# Altium PCB STM32最小系统.PcbDoc
Units mil, origin at the board's own origin, x right, y up, seen from the top; angles counter-clockwise.
Board outline 6000 x 4000 mil, 2 copper layers (Top Layer, Bottom Layer); 29 components, 14 nets, 111 pads, 0 vias.
Unrouted connection lines stored in the file: 61.
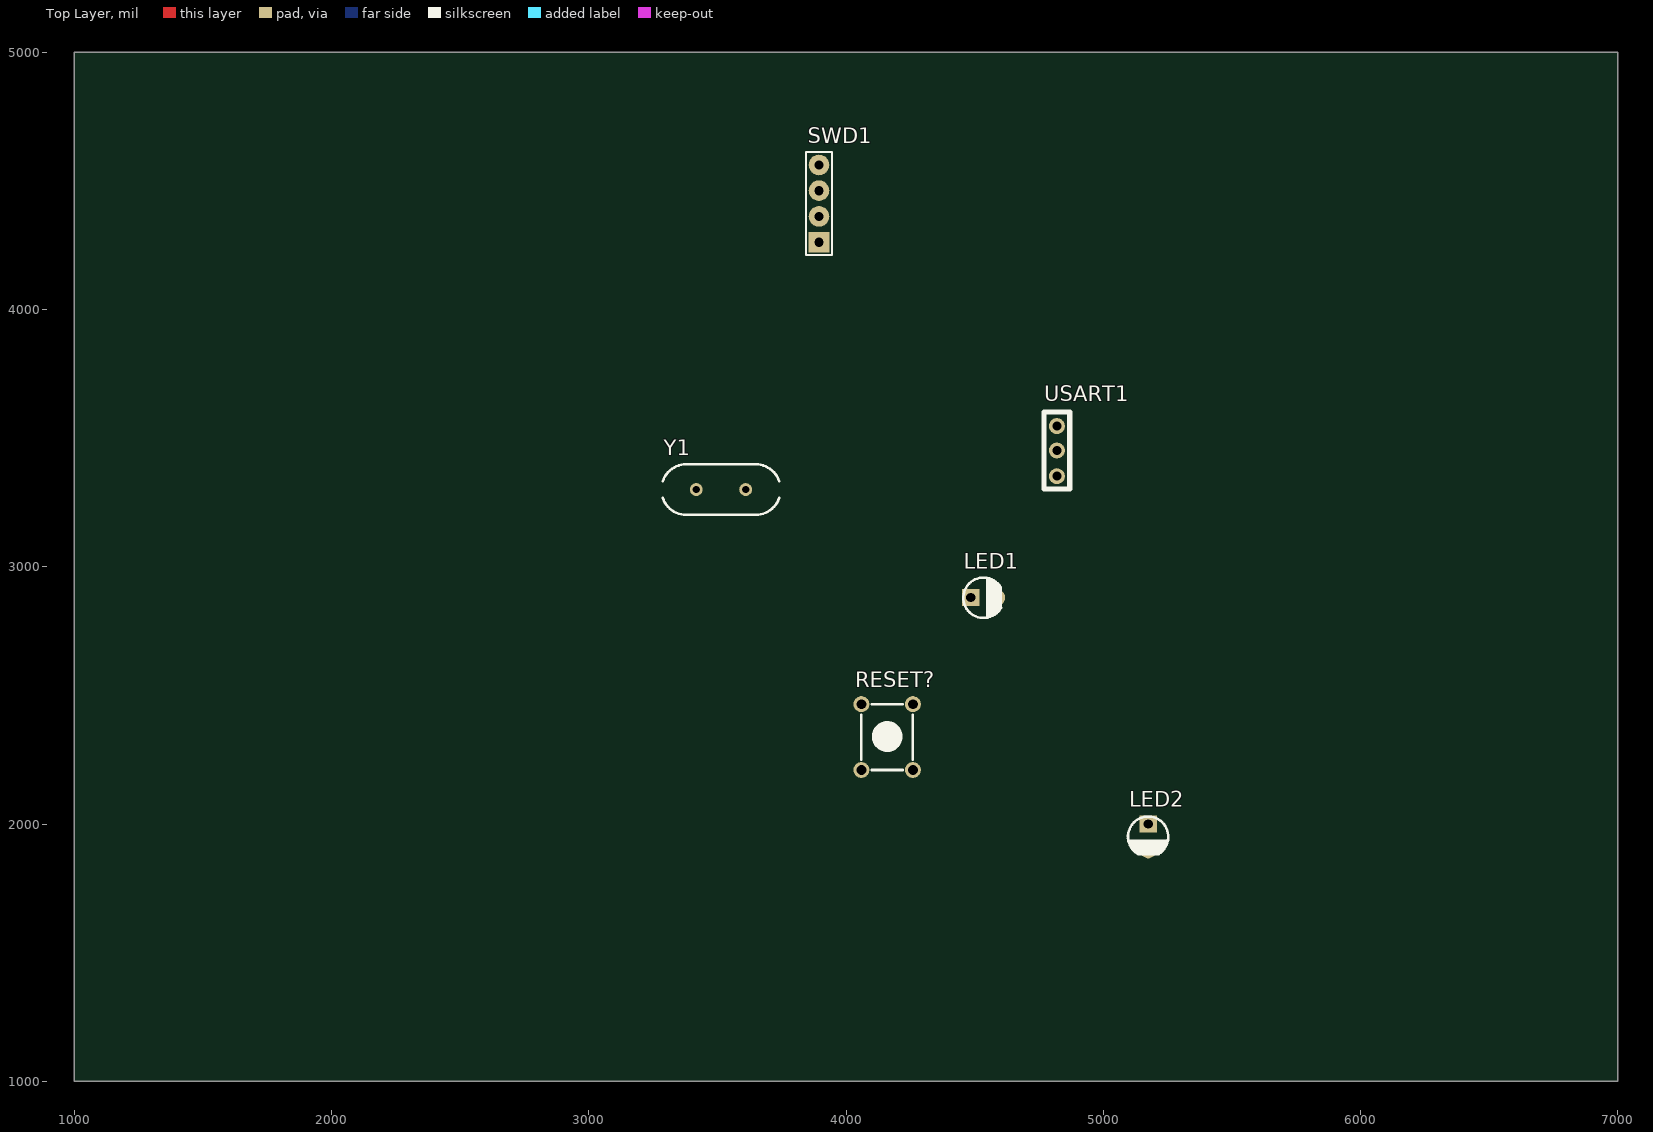
[diagram p0: Top Layer view]
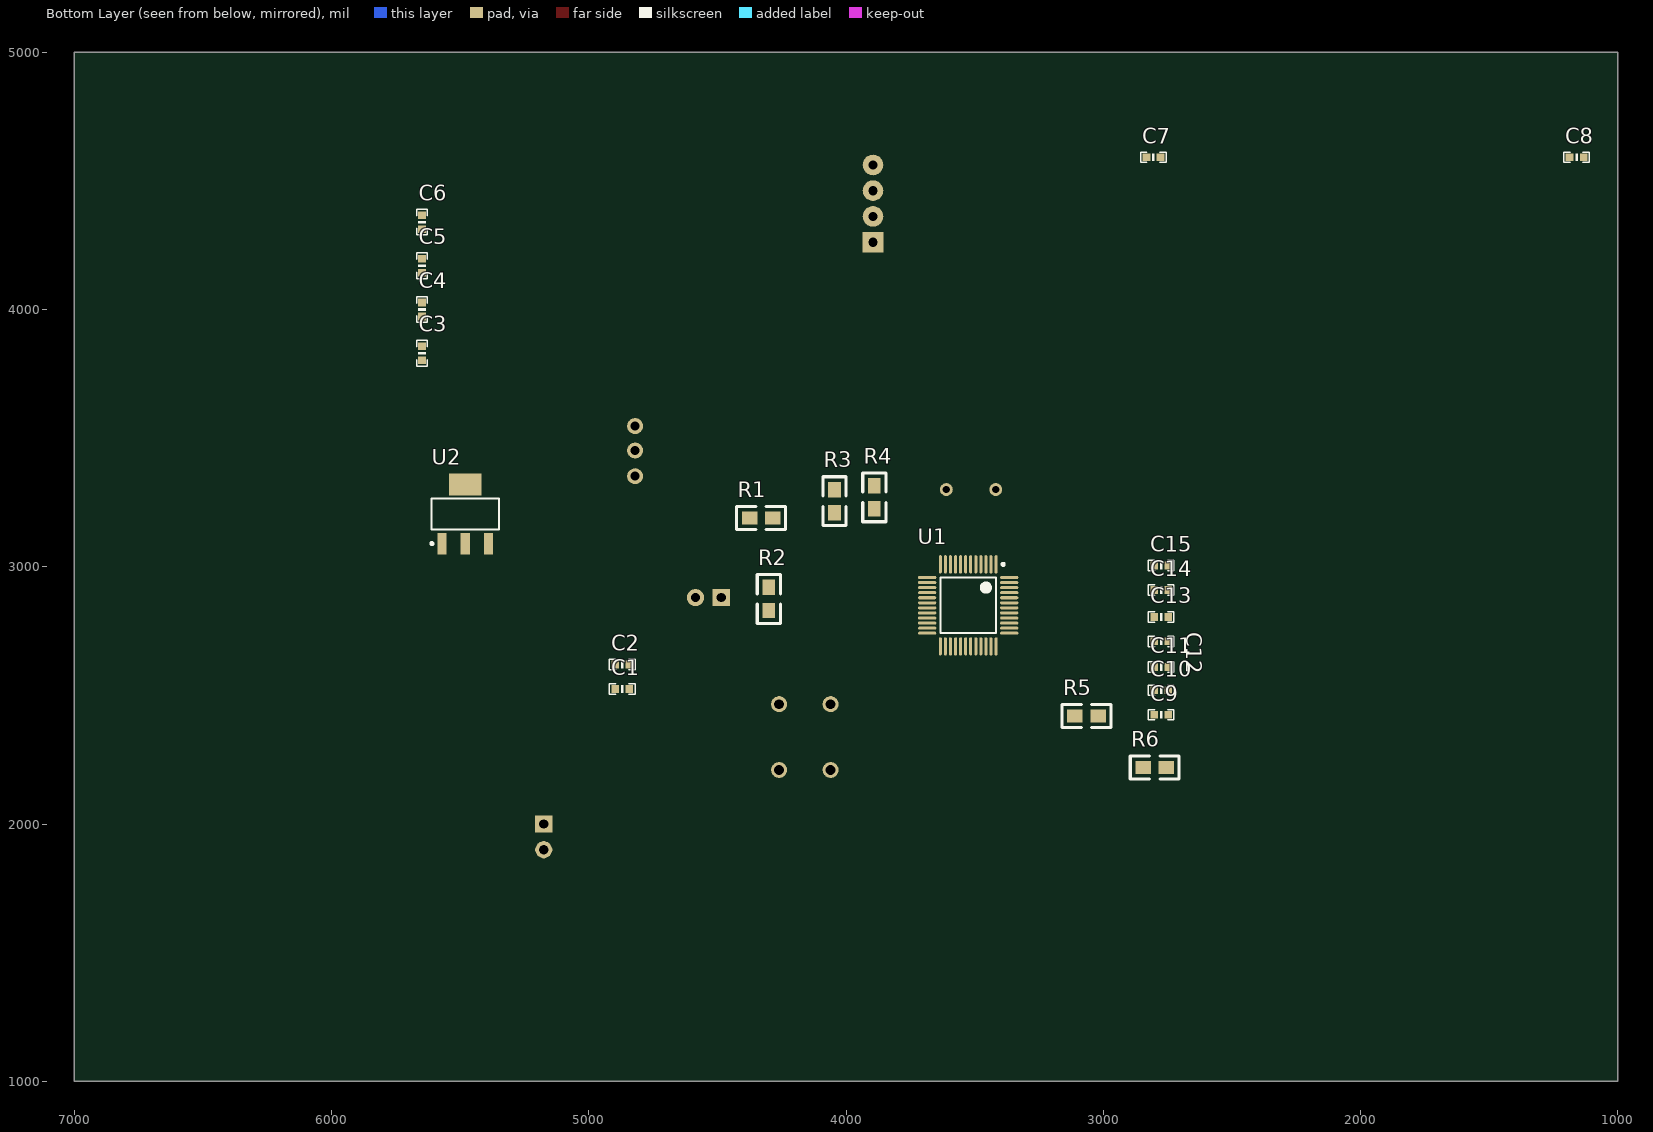
[diagram p1: Bottom Layer view, seen from below]

## Layer stack, top to bottom
Top Solder: solder mask 0.4, Solder Resist, Dk 3.5
Top Layer: signal copper 1.4
Dielectric 1: dielectric 12.6, FR-4, Dk 4.8
Bottom Layer: signal copper 1.4
Bottom Solder: solder mask 0.4, Solder Resist, Dk 3.5

## Board outline
1000,1000 7000,1000 7000,5000 1000,5000

## Design rules (kind name [scope] priority, off if disabled: settings)
Clearance [All] p1: gap=2 ignorepadtopadclearanceinfootprint=FALSE except(0: SMDPad-Hole THPad-Hole Via-Hole Fill-Hole Poly-Hole Region-Hole Text-Hole)
PolygonConnect [All] p1: connectstyle=Relief reliefconductorwidth=10 reliefentries=4 polygonreliefangle="90 Angle" airgapwidth=10
RoutingVias [All] p1: holewidth=28 width=50 viastyle="Through Hole" minholewidth=28 minwidth=50 maxholewidth=28 maxwidth=50
SolderMaskExpansion [All] p1: expansion=4
Width Width_1 [InNet('GND')] p1: maxlimit=10 minlimit=10 preferedwidth=10
Width [All] p2: maxlimit=10 minlimit=10 preferedwidth=10
30 further rules are at their usual default settings.

## Components (designator, comment, footprint, x,y, rotation, side; value= is the part's Value field where it differs from the comment)
C1 "20pF" 0603P 4870,2525 r0 bottom
C2 "20pF" 0603P 4870,2620 r180 bottom
C3 "104" 0603P 5648,3830 r270 bottom
C4 "104" 0603P 5648,4000 r270 bottom
C5 "104" 0603P 5648,4170 r270 bottom
C6 "104" 0603P 5648,4340 r270 bottom
C7 "104" 0603P 2805,4592 r180 bottom
C8 "104" 0603P 1160,4592 r180 bottom
C9 "104" 0603P 2775,2425 r180 bottom
C10 "104" 0603P 2775,2520 r180 bottom
C11 "104" 0603P 2775,2610 r180 bottom
C12 "104" 0603P 2775,2710 r180 bottom
C13 "104" 0603P 2775,2805 r180 bottom
C14 "104" 0603P 2775,2910 r180 bottom
C15 "104" 0603P 2775,3005 r180 bottom
LED1 "红色" "LED 3MM-B" 4535,2880 r0 top
LED2 "红色" "LED 3MM-B" 5175,1950 r270 top
R1 "10k" 0805 4285,3190 r0 bottom
R2 "1M" 0805 4300,2920 r270 bottom
R3 "10k" 0805 4045,3210 r90 bottom
R4 "10k" 0805 3890,3225 r90 bottom
R5 "1M" 0805 3020,2420 r0 bottom
R6 "1M" 0805 2845,2220 r180 bottom
RESET? "KEY_M" KEY_M 4060,2210 r90 top
SWD1 "SWD" SDW1 3895,4262 r90 top
U1 "STM32F103C8T6" LQFP48_N 3525,2850 r270 bottom
U2 "ASM1117" ASM1117 5480,3205 r90 bottom
USART1 "USART1" PCBComponent_1 4820,3452 r90 top
Y1 "8MHz" XTAL_US 3610,3300 r180 top

## Footprints (in the part's own frame and the unit in brackets; to place one, negate y for a bottom-side part, rotate by r counter-clockwise, add the part's x,y. Pads: shape width x height; smd on the part's side, far side on the other; paste and mask are expansions set on the pad)
0603P [mil]
  rect 30x30 smd: 1(-27,0) 2(27.5,-0.06)
  silkscreen extent -50,-20 50,20
0805 [mil]
  rect 60x50 smd: 1(0,-0.06) 2(90,-0.06)
  silkscreen extent -50,-45 140,45
ASM1117 [mm] "SOT223, 4-Leads, Body 6.50x7.00mm (avg), Pitch 2.30mm, IPC Medium Density"
  rect 2.15x0.9 smd: 1(-2.925,2.3) 2(-2.925,0) 3(-2.925,-2.3)
  rect 2.15x3.25 smd: 2(2.925,0)
  silkscreen extent -3.05,-3.35 1.55,3.43
KEY_M [mil]
  round 62 hole 38: 1(0,0) 1(255.91,0) 2(0,-200) 2(255.91,-200)
  silkscreen extent 0,-200 255,0
"LED 3MM-B" [mm]
  rect 1.7x1.7 hole 0.9: 1(-1.27,0)
  round 1.7 hole 0.9: 2(1.27,0)
  silkscreen extent -2.01,-2 1.72,1.98, body extent -1.95,-1.95 1.64,1.95, height 5.55
LQFP48_N [mm] "Thin QFP, 48-Leads, Body 7x7mm, Pitch 0.5mm, IPC Medium Density"
  oval 1.8x0.3 smd: 1(-4.05,2.75) 2(-4.05,2.25) 3(-4.05,1.75) 4(-4.05,1.25) 5(-4.05,0.75) 6(-4.05,0.25) 7(-4.05,-0.25) 8(-4.05,-0.75) 9(-4.05,-1.25) 10(-4.05,-1.75) 11(-4.05,-2.25) 12(-4.05,-2.75) 25(4.05,-2.75) 26(4.05,-2.25) 27(4.05,-1.75) 28(4.05,-1.25) 29(4.05,-0.75) 30(4.05,-0.25) 31(4.05,0.25) 32(4.05,0.75) 33(4.05,1.25) 34(4.05,1.75) 35(4.05,2.25) 36(4.05,2.75)
  oval 0.3x1.8 smd: 13(-2.75,-4.05) 14(-2.25,-4.05) 15(-1.75,-4.05) 16(-1.25,-4.05) 17(-0.75,-4.05) 18(-0.25,-4.05) 19(0.25,-4.05) 20(0.75,-4.05) 21(1.25,-4.05) 22(1.75,-4.05) 23(2.25,-4.05) 24(2.75,-4.05) 37(2.75,4.05) 38(2.25,4.05) 39(1.75,4.05) 40(1.25,4.05) 41(0.75,4.05) 42(0.25,4.05) 43(-0.25,4.05) 44(-0.75,4.05) 45(-1.25,4.05) 46(-1.75,4.05) 47(-2.25,4.05) 48(-2.75,4.05)
  silkscreen extent -4.17,-2.75 2.75,3.57, body extent -3.5,-3.5 3.5,3.5, height 1.6
PCBComponent_1 [mil]
  round 62 hole 35: 1(-100,0) 2(0,0) 3(95,0)
  silkscreen extent -150,-50 150,50
SDW1 [mil] "Header4"
  rect 80x80 hole 36: 1(0,0)
  round 80 hole 36: 2(100,0) 3(200,0) 4(300,0)
  silkscreen extent -50,-50 350,50, body extent -50,-50 350,50, height 335
XTAL_US [mil]
  round 50 hole 28: 1(0,0) 2(192.13,0)
  silkscreen extent -131,-98 323,98

## Part data
C1 C2 C3 C4 C5 C6 C7 C8 C9 C10 C11 C12 C13 C14 C15: library part C
LED1 LED2: library part LED-3MM, "插件LED", BOM名称=插件LED, 学习资源=www.ooocke.com, 版权归属=源创客
R1 R2 R3 R4 R5 R6: library part R
Y1: library part XTAL, "Crystal Oscillator", LatestRevisionDate=17-Jul-2002, LatestRevisionNote="Re-released for DXP Platform.", Published=8-Jun-2000, Publisher="Altium Limited"

## Nets (pads, with @x,y where several pads share a name; then routed paths per layer and width w, separated by ;. In a path a pad name is that pad's centre, name@x,y a point inside that pad or via, vN(x,y) a via of type N, cw(c..) or ccw(c..) an arc to the next point about the centre after c; other vN are vias at no path point)
GND: C1.2 C2.2 C3.1 C4.1 C5.1 C6.1 C7.1 C8.1 C9.1 C10.1 C11.1 C12.1 C13.1 C14.1 C15.1 LED1.2 LED2.2 RESET?.2 U1.8 U1.20 U1.23 U1.35 U1.44 U1.47 U2.1
LED: R3.1 U1.11
NetLED1_1: LED1.1 R1.2
NetLED2_1: LED2.1 R3.2
NRST: C7.2 R4.2 RESET?.1 U1.7
OSC_IN: C1.1 R2.2 U1.5 Y1.2
OSC_OUT: C2.1 R2.1 U1.6 Y1.1
RX1: U1.31
SWCLK: R5.1 U1.37
SWDIO: R6.1 U1.34
TX1: U1.30
VCC3.3: C8.2 C9.2 C10.2 C11.2 C12.2 C13.2 C14.2 C15.2 R1.1 R4.1 R5.2 R6.2 U1.1 U1.9 U1.24 U1.36 U1.48
VCC_3.3: C5.2 C6.2 U2.2
VCC_IN: C3.2 C4.2 U2.3
pads on no net: SWD1.1 SWD1.2 SWD1.3 SWD1.4 U1.2 U1.3 U1.4 U1.10 U1.12 U1.13 U1.14 U1.15 U1.16 U1.17 U1.18 U1.19 U1.21 U1.22 U1.25 U1.26 U1.27 U1.28 U1.29 U1.32 U1.33 U1.38 U1.39 U1.40 U1.41 U1.42 U1.43 U1.45 U1.46 USART1.1 USART1.2 USART1.3